# Altium PCB REG113-33_pcb.PcbDoc
Units mm, origin at the board's own origin, x right, y up, seen from the top; angles counter-clockwise.
Board outline 13.4 x 13.4 mm, 4 copper layers (Top Layer, Layer 1, Layer 2, Bottom Layer 1), stack 0.775 mm thick; 7 components, 5 nets, 14 pads, 59 vias.
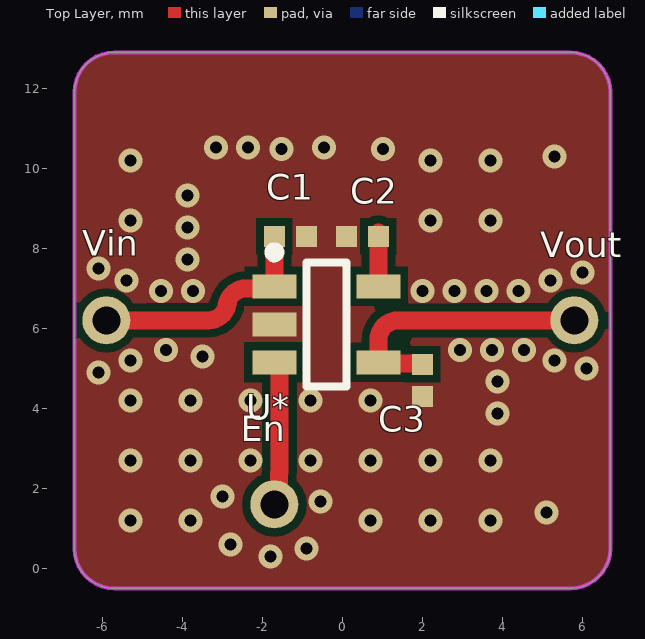
[diagram p0: Top Layer view]
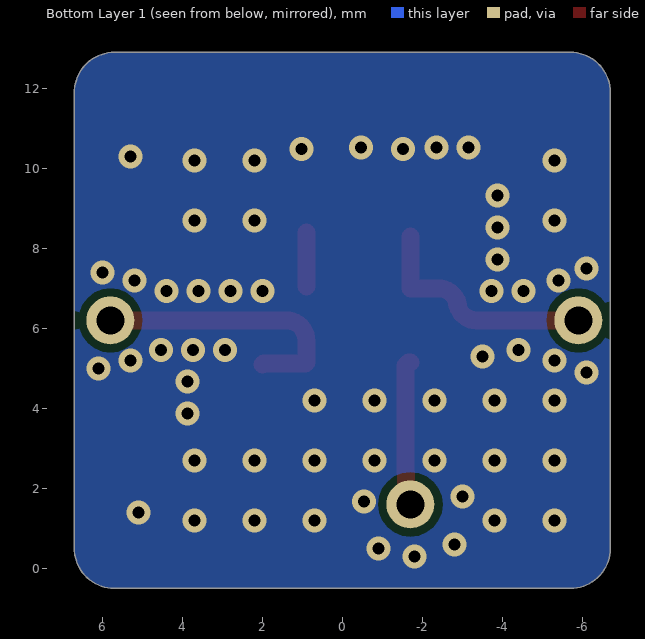
[diagram p1: Bottom Layer 1 view, seen from below]
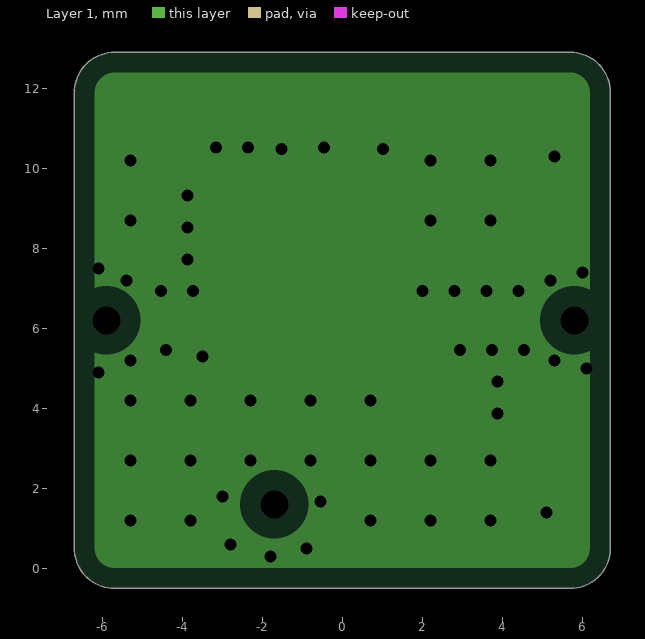
[diagram p2: Layer 1, clearances drawn from the general rule]
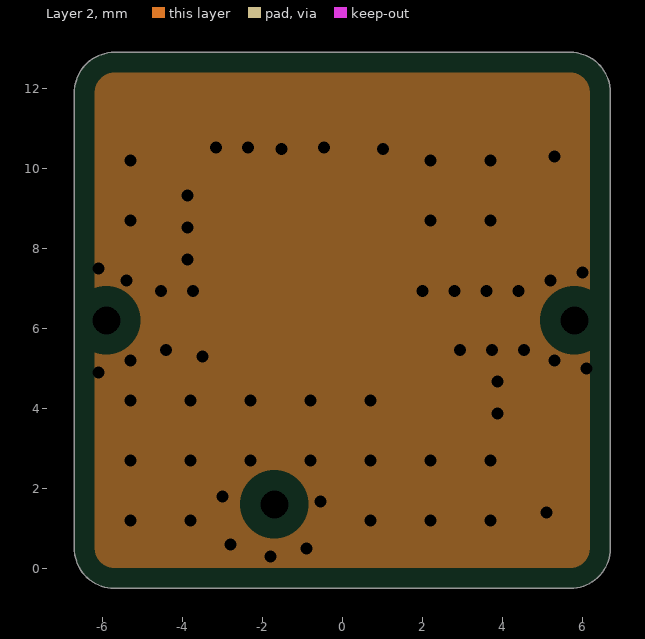
[diagram p3: Layer 2, clearances drawn from the general rule]

## Layer stack, top to bottom
Top Solder: solder mask 0.0102, Solder Resist, Dk 3.5
Top Layer: signal copper 0.035
Dielectric 2: prepreg 0.254, PP-006, Dk 4.1
Layer 1: plane copper 0.035, net GND
Dielectric 1: dielectric 0.127, FR-4, Dk 4.8
Layer 2: plane copper 0.035, net GND
Dielectric 3: prepreg 0.254, PP-006, Dk 4.1
Bottom Layer 1: signal copper 0.035
Bottom Solder: solder mask 0.0102, Solder Resist, Dk 3.5

## Board outline
-6.7,0.5 -6.7,11.9 cw(c-5.7,11.9) -5.7,12.9 5.7,12.9 cw(c5.7,11.9) 6.7,11.9 6.7,0.5 cw(c5.7,0.5) 5.7,-0.5 -5.7,-0.5 cw(c-5.7,0.5)

## Design rules (kind name [scope] priority, off if disabled: settings)
Clearance [All] p1: gap=0.2 ignorepadtopadclearanceinfootprint=FALSE
HoleSize [All] p1: absolutevalues=TRUE maxlimit=5 minlimit=0.3 maxpercent=80.000 minpercent=20.000
PlaneClearance [All] p1: clearance=0.508
PlaneConnect [All] p1: planeconnectstyle=Direct reliefexpansion=0.508 reliefentries=4 reliefconductorwidth=0.254 reliefairgap=0.254
PolygonConnect [All] p1: connectstyle=Direct reliefconductorwidth=0.254 reliefentries=4 polygonreliefangle="90 Angle" airgapwidth=0.254
RoutingVias [All] p1: holewidth=0.711 width=1.27 viastyle="Through Hole" minholewidth=0.711 minwidth=1.27 maxholewidth=0.711 maxwidth=1.27 useviatemplates=TRUE viatemplateguid#1={0DF0FB4D-128F-44F0-A264-6A1C46DBE500} viatemplatename#1=v60h30m0mx0
SolderMaskExpansion [All] p1: expansion=0.102
Width Width_50ohm [InNetClass('50ohm')] p1: maxlimit=0.45 minlimit=0.45 preferedwidth=0.45 impedanceprofiledriven=TRUE impedanceprofileid={D2B77361-9B7D-4BD5-B69E-70E315500705} impedanceprofilevalue=50.000000 minimp=50.000000 maximp=50.000000 favimp=50.000000 checkconnectedcopper=TRUE
Width [All] p2: maxlimit=5 minlimit=0.2 preferedwidth=0.2
27 further rules are at their usual default settings.

## Components (designator, comment, footprint, x,y, rotation, side; value= is the part's Value field where it differs from the comment)
C1 "100nF" 0402-CAP -1.3,8.3 r0 top value=100n
C2 "10nF" 0402-CAP 0.5,8.3 r180 top value=10n
C3 "100nF" 0402-CAP 2,4.7 r270 top value=100n
En "TEST_VIA_RF" "New footprint 1" -1.7,1.6 r0 top
U* "REG113EA-3.3" SOT95P280X145-5N -0.4,6.1 r0 top
Vin "TEST_VIA_RF" "New footprint 1" -5.9,6.2 r90 top
Vout "TEST_VIA_RF" "New footprint 1" 5.8,6.2 r90 top

## Footprints (in the part's own frame and the unit in brackets; to place one, negate y for a bottom-side part, rotate by r counter-clockwise, add the part's x,y. Pads: shape width x height; smd on the part's side, far side on the other; paste and mask are expansions set on the pad)
0402-CAP [mm] "Chip Capacitor, Body 1.0x0.5mm, Height 0.6mm, IPC Medium Density"
  rect 0.52x0.52 smd: 1(-0.4,0) 2(0.4,0)
  body extent -0.55,-0.3 0.55,0.3, height 0.33
"New footprint 1" [mm]
  round 1.2 hole 0.7: 1(0,0)
SOT95P280X145-5N [mm] "SOT23, 5-Leads, Body 2,90x2,80mm, Pitch 0,95mm, IPC Medium Density"
  rect 1.1x0.6 smd: 1(-1.3,0.95) 2(-1.3,0) 3(-1.3,-0.95) 4(1.3,-0.95) 5(1.3,0.95)
  silkscreen extent -1.42,-1.55 0.5,1.92, body extent -0.87,-1.52 0.87,1.53, height 1.45

## Part data
C1 C3: library part CC0402-100nF-50v-A.4, "CAP CER 0.1UF 50V 10% X7R 0402", Part No=C1005X7R1H104K050BB, Cod EMS=05.281.019.021
C2: library part CC0402-10nF-5, "CAP CER 10000PF 25V 5% X7R 0402", Part No=GRM155R71E103JA01J, Cod EMS=05.281.019.508
En Vin Vout: library part TEST_VIA_RF-01.A.1, "Test VIA for RF circuits"
U*: library part REG113EA-3.3-01.A.1, "IC REG LINEAR 3.3V 400MA 8VSSOP"

## Via types
v1: diameter 0.6, hole 0.3, Top Layer to Bottom Layer 1, tented both sides, 59 vias

## Nets (pads, with @x,y where several pads share a name; then routed paths per layer and width w, separated by ;. In a path a pad name is that pad's centre, name@x,y a point inside that pad or via, vN(x,y) a via of type N, cw(c..) or ccw(c..) an arc to the next point about the centre after c; other vN are vias at no path point)
GND: C1.2 C2.2 C3.2 U*.2
  other v1: -1.8,0.3 -0.9,0.5 -2.8,0.6 -5.3,1.2 -3.8,1.2 0.7,1.2 2.2,1.2 3.7,1.2 5.1,1.4 -0.541,1.67 -3,1.8 -5.3,2.7 -3.8,2.7 -2.3,2.7 -0.8,2.7 0.7,2.7 2.2,2.7 3.7,2.7 3.875,3.865 -5.3,4.2 -3.8,4.2 -2.3,4.2 -0.8,4.2 0.7,4.2 3.875,4.665 -6.1,4.9 6.1,5 -5.3,5.2 5.3,5.2 -3.5,5.3 -4.407,5.461 2.935,5.461 3.735,5.461 4.535,5.461 -4.528,6.939 -3.728,6.939 1.999,6.939 2.799,6.939 3.599,6.939 4.399,6.939 -5.4,7.2 5.2,7.2 6,7.4 -6.1,7.5 -3.875,7.726 -3.875,8.526 -5.3,8.7 2.2,8.7 3.7,8.7 -3.875,9.326 -5.3,10.2 2.2,10.2 3.7,10.2 5.3,10.3 -1.52,10.481 1.02,10.481 -3.156,10.52 -2.356,10.52 -0.461,10.52
NetC1_1: C1.1 U*.1 Vin.1 | length 7.3
  Top Layer w0.45: Vin.1@-5.7,6.2 -3.54,6.2 ; -4.9,6.2 -3.36,6.2 ccw(c-3.36,6.7) -2.9,6.504 ccw(c-3.36,6.7) -2.86,6.696 ; -2.9,6.5 cw(c-2.4,6.5) -2.9,6.504 cw(c-2.4,6.5) -2.86,6.696 ; -2.86,6.7 cw(c-3.36,6.7) -2.86,6.696 ; C1.1 U*.1 -1.7,7 -2.4,7 ccw(c-2.4,6.5) -2.86,6.696
NetC2_1: C2.1 U*.5 | length 1.4
  Top Layer w0.45: U*.5 C2.1@0.9,8.4
NetC3_1: C3.1 U*.4 Vout.1 | length 7.6
  Top Layer w0.45: C3.1 1.975,5.125 0.925,5.125 U*.4 0.9,5.7 cw(c1.4,5.7) 1.4,6.2 2.1,6.2 ; 2.94,6.2 2.1,6.2 ; Vout.1@5.7,6.2 2.1,6.2
NetEn_1: En.1 U*.3 | length 3.7
  Top Layer w0.45: En.1 -1.586,1.714 -1.586,2.389 -1.575,2.4 -1.575,5.075 -1.65,5.15 U*.3

## Polygon pours and split planes (outlines as drawn)
GND on Bottom Layer 1 "Bottom Layer 1-GND" (solid, pour order 3): -5.7,-0.5 cw(c-5.7,0.5) -6.7,0.5 -6.7,11.9 cw(c-5.7,11.9) -5.7,12.9 5.7,12.9 cw(c5.7,11.9) 6.7,11.9 6.7,0.5 cw(c5.7,0.5) 5.7,-0.5
GND on Top Layer "Top Layer-GND" (solid, pour order 5): -5.7,-0.5 cw(c-5.7,0.5) -6.7,0.5 -6.7,11.9 cw(c-5.7,11.9) -5.7,12.9 5.7,12.9 cw(c5.7,11.9) 6.7,11.9 6.7,0.5 cw(c5.7,0.5) 5.7,-0.5
GND on Layer 1 (split plane): 5.796,12.382 5.888,12.354 5.973,12.309 6.048,12.248 6.109,12.173 6.154,12.088 6.182,11.996 6.191,11.912 6.19,11.9 6.19,0.5 6.191,0.488 6.182,0.404 6.154,0.312 6.109,0.227 6.048,0.152 5.973,0.091 5.888,0.046 5.796,0.018 5.712,0.009 5.7,0.01 -5.7,0.01 -5.712,0.009 -5.796,0.018 -5.888,0.046 -5.973,0.091 -6.048,0.152 -6.109,0.227 -6.154,0.312 -6.182,0.404 -6.191,0.488 -6.19,0.5 -6.19,11.9 -6.191,11.912 -6.182,11.996 -6.154,12.088 -6.109,12.173 -6.048,12.248 -5.973,12.309 -5.888,12.354 -5.796,12.382 -5.712,12.391 -5.7,12.39 5.7,12.39 5.712,12.391
GND on Layer 2 (split plane): 5.796,12.382 5.888,12.354 5.973,12.309 6.048,12.248 6.109,12.173 6.154,12.088 6.182,11.996 6.191,11.912 6.19,11.9 6.19,0.5 6.191,0.488 6.182,0.404 6.154,0.312 6.109,0.227 6.048,0.152 5.973,0.091 5.888,0.046 5.796,0.018 5.712,0.009 5.7,0.01 -5.7,0.01 -5.712,0.009 -5.796,0.018 -5.888,0.046 -5.973,0.091 -6.048,0.152 -6.109,0.227 -6.154,0.312 -6.182,0.404 -6.191,0.488 -6.19,0.5 -6.19,11.9 -6.191,11.912 -6.182,11.996 -6.154,12.088 -6.109,12.173 -6.048,12.248 -5.973,12.309 -5.888,12.354 -5.796,12.382 -5.712,12.391 -5.7,12.39 5.7,12.39 5.712,12.391

## Keep-outs
Top Layer:
  the board outline again, w0.1

## Silkscreen, mask and mechanical layers (free items; w line width, h text height)
Mechanical 1:
  the board outline again, w0.2